# EAGLE board WirelessTransceiverUSB_Rev- (EAGLE 9.6.2)
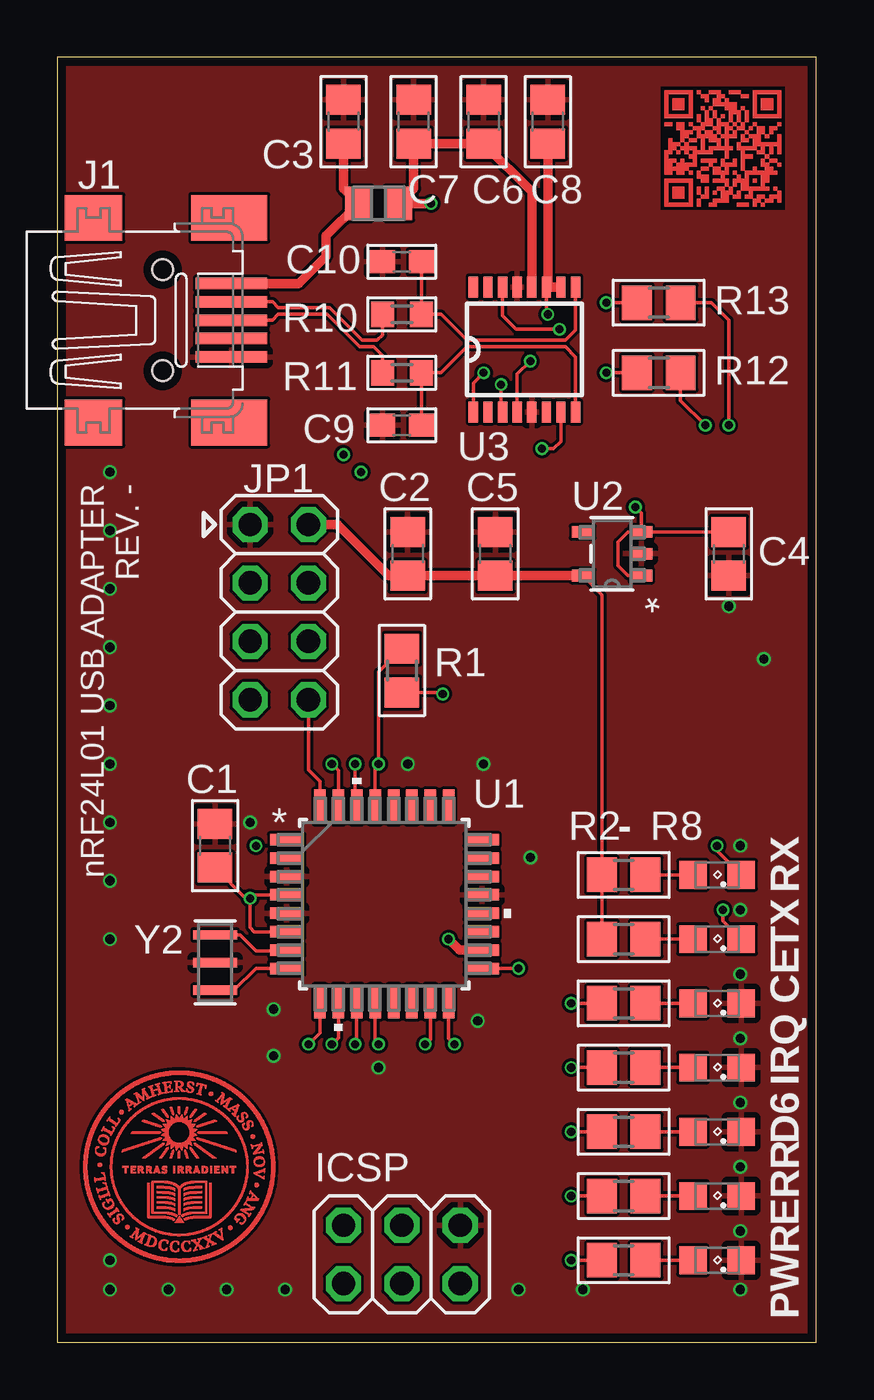
[diagram p0: board, top side]
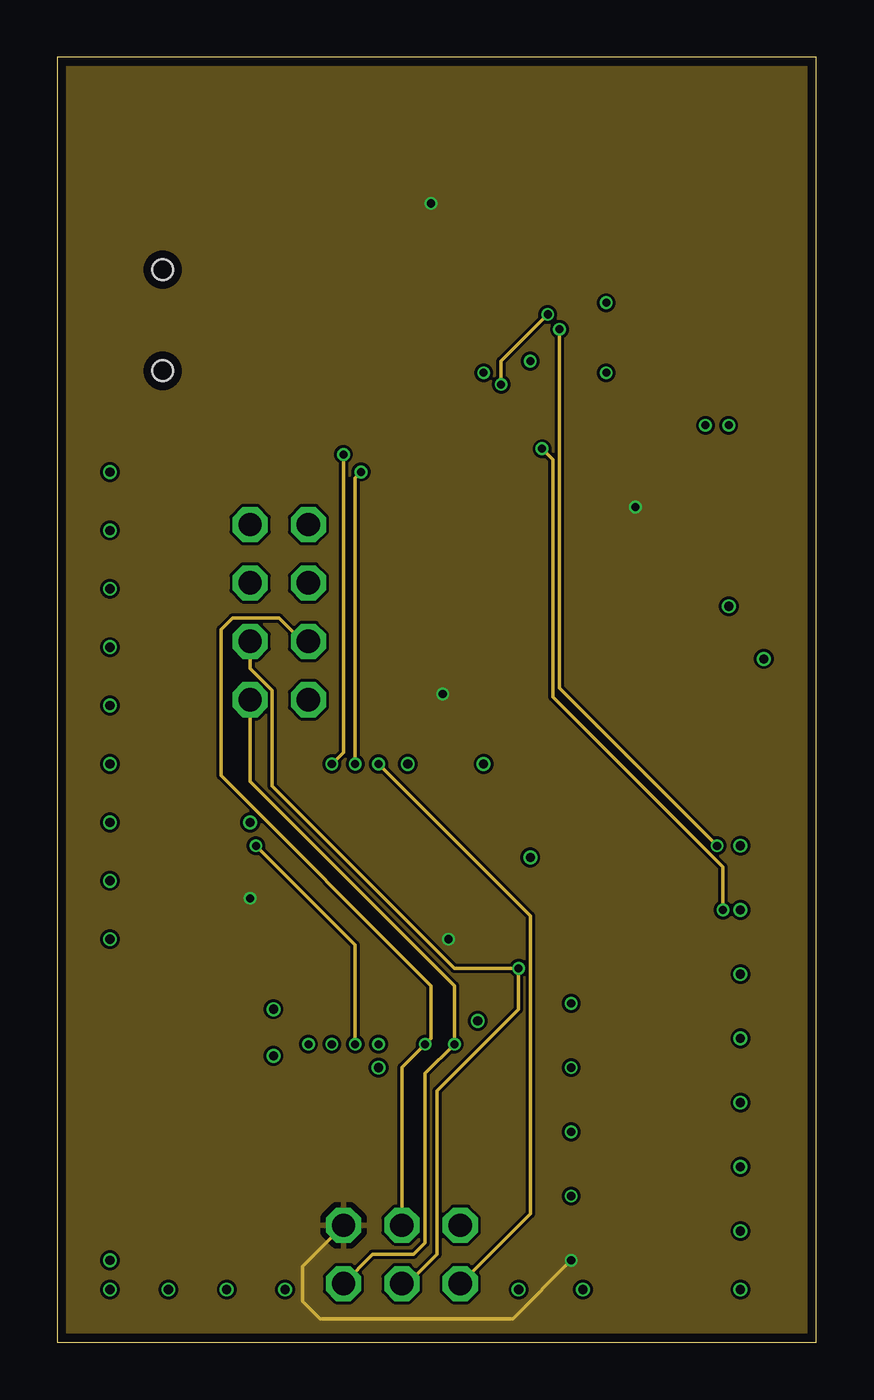
[diagram p1: board, inner layer Route2]
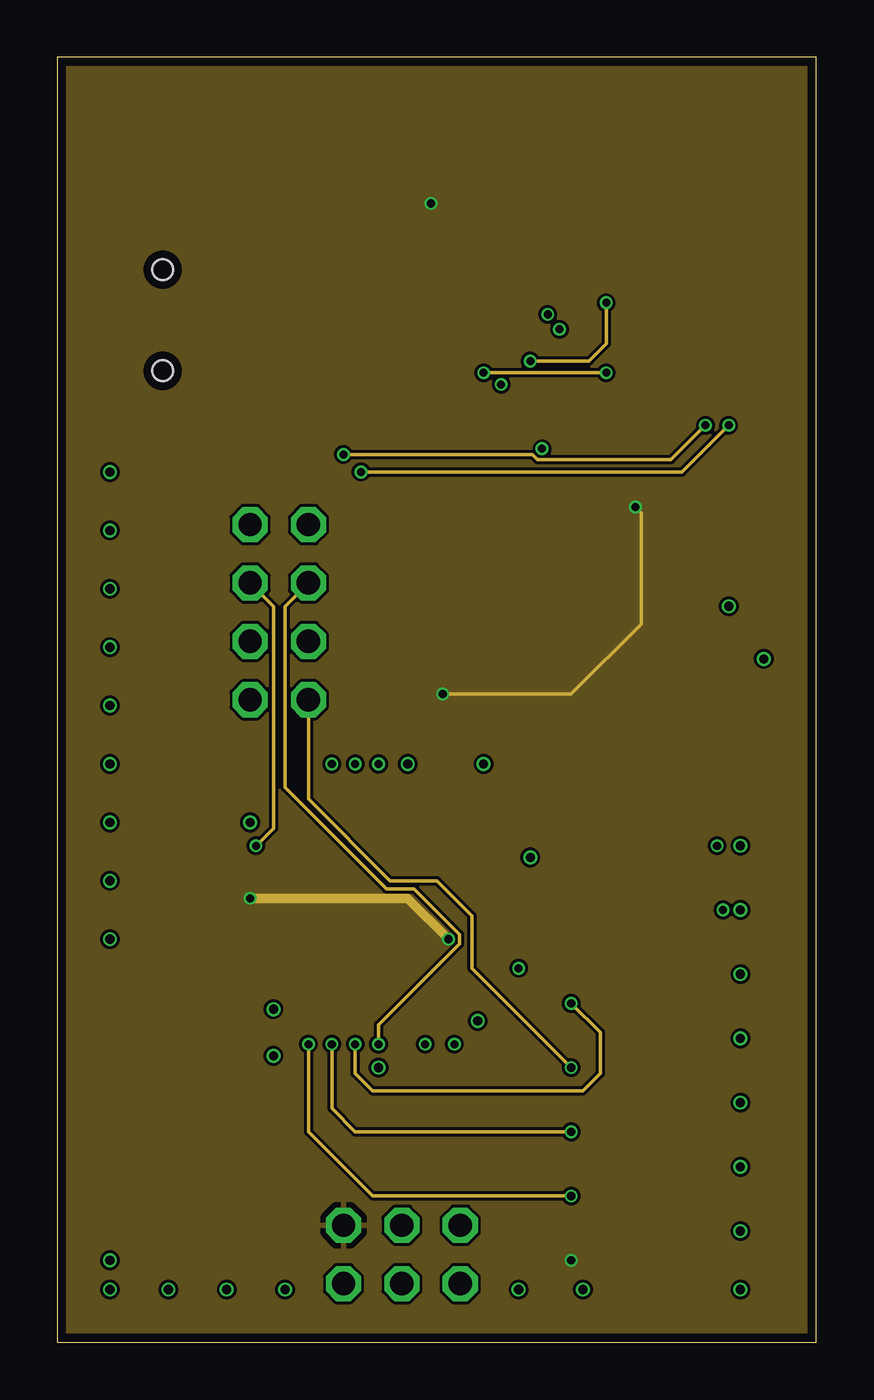
[diagram p2: board, inner layer Route15]
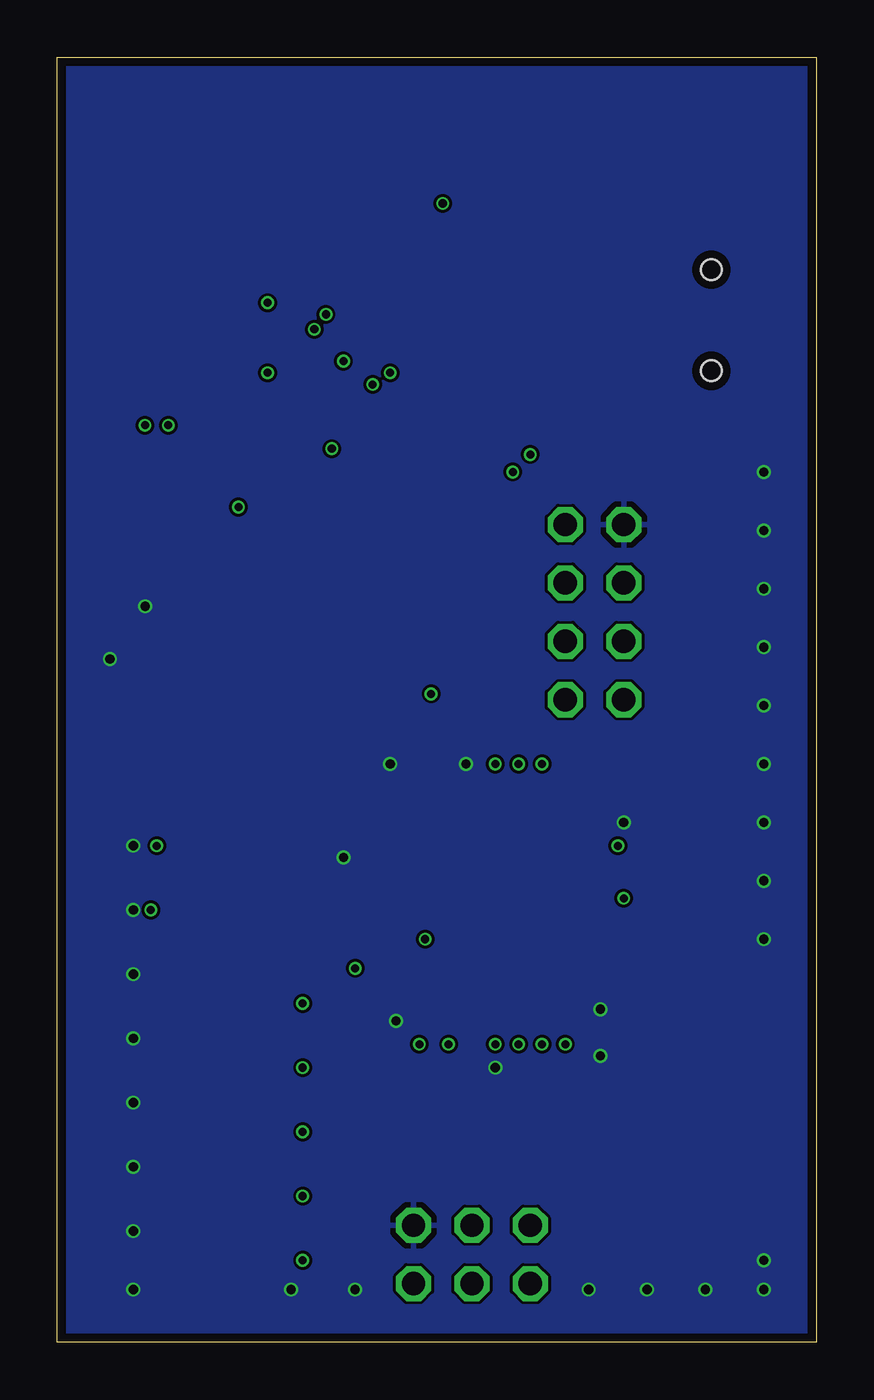
[diagram p3: board, bottom side, seen from below]

Size 33.02 x 55.88 mm. Coordinates in mm from the lower left corner, seen from the top.
Outline: 0,0 33.02,0 33.02,55.88 0,55.88 0,0
Copper layers (1*2*15*16): Top 0.035559375mm / dielectric 0.17018125mm / Route2 0.01778125mm / dielectric 47mil / Route15 0.01778125mm / dielectric 0.17018125mm / Bottom 0.035559375mm
Design rules "oshpark-4layer": minimum track width 5mil, minimum drill 10mil, track to track 5mil, track to pad 5mil, pad to pad 5mil, via to via 5mil, smd to smd 5mil, copper to edge 15mil, drill to drill 6mil, minimum pad ring 4mil, minimum via ring 4mil, stop-mask expansion 1.5mil, vias tented up to drill 0mil, thermal gap 10mil
Net classes: 1 diff: width 0.152 mm
tRestrict: area 4,6.3 to 6.6,8.9; area 26.3,49.3 to 31.7,54.6

## Footprints (pad centres in the part's own frame; a part is rotated, then mirrored left to right if it is on the bottom)
C0805 = smd 1.3 x 1.5: 1 -0.95,0; 2 0.95,0
C0603 = smd 1.1 x 1: 1 -0.85,0; 2 0.85,0
SML0805 = smd 1.2 x 1.2: A 1.05,0; C -1.05,0
2X03 = drill 1.016 octagon: 1 -2.54,-1.27; 2 -2.54,1.27; 3 0,-1.27; 4 0,1.27; 5 2.54,-1.27; 6 2.54,1.27
32005-201 = smd 3.1 x 0.5: 1 3,1.6; 2 3,0.8; 3 3,0; 4 3,-0.8; 5 3,-1.6 | smd 2.5 x 2: M1 -3,-4.45; M2 -3,4.45 | smd 3.3 x 2: M3 2.9,4.45; M4 2.9,-4.45 | hole 0.9: 0,2.2; 0,-2.2
2X04 = drill 1.016 octagon: 1 -3.81,-1.27; 2 -3.81,1.27; 3 -1.27,-1.27; 4 -1.27,1.27; 5 1.27,-1.27; 6 1.27,1.27; 7 3.81,-1.27; 8 3.81,1.27
IND_25_0805_FRT = smd 1.168 x 1.448: 1 -0.876,0; 2 0.876,0
R0805 = smd 1.3 x 1.5: 1 -0.95,0; 2 0.95,0
R0603 = smd 1 x 1.1: 1 -0.85,0; 2 0.85,0
32A_MCH = smd 1.461 x 0.501: 1 -4.25,2.8; 2 -4.25,2; 3 -4.25,1.2; 4 -4.25,0.4; 5 -4.25,-0.4; 6 -4.25,-1.2; 7 -4.25,-2; 8 -4.25,-2.8; 17 4.25,-2.8; 18 4.25,-2; 19 4.25,-1.2; 20 4.25,-0.4; 21 4.25,0.4; 22 4.25,1.2; 23 4.25,2; 24 4.25,2.8 | smd 0.501 x 1.461: 9 -2.8,-4.25; 10 -2,-4.25; 11 -1.2,-4.25; 12 -0.4,-4.25; 13 0.4,-4.25; 14 1.2,-4.25; 15 2,-4.25; 16 2.8,-4.25; 25 2.8,4.25; 26 2,4.25; 27 1.2,4.25; 28 0.4,4.25; 29 -0.4,4.25; 30 -1.2,4.25; 31 -2,4.25; 32 -2.8,4.25
UJ_5_ADI = smd 0.953 x 0.508: 1 -1.276,0.95; 2 -1.276,0; 3 -1.276,-0.95; 4 1.276,-0.95; 5 1.276,0.95
SSOP16 = smd 0.914 x 0.406: 1 -2.718,2.223; 2 -2.718,1.587; 3 -2.718,0.953; 4 -2.718,0.318; 5 -2.718,-0.318; 6 -2.718,-0.953; 7 -2.718,-1.587; 8 -2.718,-2.223; 9 2.718,-2.223; 10 2.718,-1.587; 11 2.718,-0.953; 12 2.718,-0.318; 13 2.718,0.318; 14 2.718,0.953; 15 2.718,1.587; 16 2.718,2.223
CSTNE16M0V530000R0_MUR = smd 0.406 x 1.905: 1 -1.2,0; 2 0,0; 3 1.2,0

## Placement (x,y rotation side)
C1  1u  [C0805]  6.86,21.59 90 top
C2  1u  [C0805]  15.24,34.29 90 top
C3  10n  [C0805]  12.45,53.09 90 top
C4  1u  [C0805]  29.21,34.29 270 top
C5  1u  [C0805]  19.05,34.29 90 top
C6  100n  [C0805]  18.54,53.09 90 top
C7  4.7u  [C0805]  15.49,53.09 90 top
C8  100n  [C0805]  21.34,53.09 90 top
C9  47p  [C0603]  14.99,39.88 180 top
C10  47p  [C0603]  14.99,46.99 180 top
CE  [SML0805]  28.7,14.73 180 top
ICSP  [2X03]  14.99,3.81 0 top
IRQ  [SML0805]  28.7,11.94 180 top
J1  MINI-USB-32005-201  [32005-201]  4.57,44.45 0 top
JP1  [2X04]  9.65,31.75 90 top
L1  2508056017Y2  [IND_25_0805_FRT]  13.97,49.53 0 top
PD5  [SML0805]  28.7,6.35 180 top
PD6  [SML0805]  28.7,9.14 180 top
PWR  [SML0805]  28.7,3.56 180 top
R1  4.7k  [R0805]  14.99,29.21 90 top
R2  4.7k  [R0805]  24.64,20.32 0 top
R3  4.7k  [R0805]  24.64,17.53 0 top
R4  4.7k  [R0805]  24.64,14.73 0 top
R5  4.7k  [R0805]  24.64,11.94 0 top
R6  4.7k  [R0805]  24.64,9.14 0 top
R7  4.7k  [R0805]  24.64,6.35 0 top
R8  4.7k  [R0805]  24.64,3.56 0 top
R10  27  [R0603]  14.99,44.7 180 top
R11  27  [R0603]  14.99,42.16 0 top
R12  1k  [R0805]  26.16,42.16 180 top
R13  1k  [R0805]  26.16,45.21 180 top
RX  [SML0805]  28.7,20.32 180 top
TX  [SML0805]  28.7,17.53 180 top
U1  ATMEGA328PB-AU  [32A_MCH]  14.22,19.05 0 top
U2  ADP121-AUJZ33R7  [UJ_5_ADI]  24.13,34.29 180 top
U3  FT230XS  [SSOP16]  20.32,43.18 90 top
Y2  CSTNE16M0V530000R0  [CSTNE16M0V530000R0_MUR]  6.86,16.51 90 top

## Library data of the parts
C1-C10 R1-R8 R10-R13 = rcl
CE IRQ PD5 PD6 PWR RX TX = led
ICSP JP1 = pinhead
J1 = con-cypressindustries; OC_FARNELL: unknown; OC_NEWARK: unknown
L1 = rcl; COPYRIGHT: Copyright (C) 2023 Ultra Librarian. All rights reserved.; MANUFACTURER_PART_NUMBER: 2508056017Y2; MFR_NAME: Fair-Rite
U1 = microchip; COPYRIGHT: Copyright (C) 2023 Ultra Librarian. All rights reserved.; MANUFACTURER_PART_NUMBER: ATMEGA328PB-AU; MFR_NAME: Microchip
U2 = linear; COPYRIGHT: Copyright (C) 2023 Ultra Librarian. All rights reserved.; MANUFACTURER_PART_NUMBER: ADP121-AUJZ33R7; MFR_NAME: Analog Devices Inc
U3 = ftdichip
Y2 = murata; COPYRIGHT: Copyright (C) 2023 Ultra Librarian. All rights reserved.; MANUFACTURER_PART_NUMBER: CSTNE16M0V530000R0; MFR_NAME: Murata

## Nets
3V3: C2.1 C5.1 JP1.7 R2.1 R3.1 U2.5
5V0: C1.1 C4.1 C6.1 C7.1 ICSP.2 L1.2 R1.1 R8.1 U1.4 U1.6 U1.18 U2.1 U2.3 U3.12
CE: JP1.6 R4.1 U1.11
CSN: JP1.5 U1.12
D_N [diff]: J1.2 R10.2
D_P [diff]: J1.3 R11.1
GND: C1.2 C2.2 C3.2 C4.2 C5.2 C6.2 C7.2 C8.2 C9.2 C10.2 CE.C ICSP.6 IRQ.C J1.5 JP1.8 PD5.C PD6.C PWR.C U1.3 U1.5 U1.21 U2.2 U3.5 U3.13 Y2.2
ID: J1.4
IRQ: JP1.1 R5.1 U1.32
MISO: ICSP.1 JP1.2 U1.16
MOSI: ICSP.4 JP1.3 U1.15
N$1: R2.2 RX.A
N$2: U1.7 Y2.3
N$3: U1.8 Y2.1
N$4: R3.2 TX.A
N$5: CE.A R4.2
N$6: IRQ.A R5.2
N$7: PD5.A R7.2
N$8: PD6.A R6.2
N$9: PWR.A R8.2
N$11: C8.1 U3.3 U3.10 U3.11
N$13: TX.C U3.7
N$14: RX.C U3.14
N$15: R12.2 U3.1
N$16: R13.2 U3.4
PD5: R7.1 U1.9
PD6: R6.1 U1.10
RESET: ICSP.5 R1.2 U1.29
RX: R12.1 U1.31
SCK: ICSP.3 JP1.4 U1.17
TX: R13.1 U1.30
USBD_N [diff]: C10.1 R10.1 U3.9
USBD_P [diff]: C9.1 R11.2 U3.8
VBUS: C3.1 J1.1 L1.1

## Tracks (layer width: path | path; a pad name or v marks a point on that pad's centre or on a via)
3V3
  Top 0.152: R3.1 R2.1 23.69,32.51 U2.5
  Top 0.406: U2.5 C5.1 C2.1 14.41,33.34 12.19,35.56 JP1.7
5V0  (via drill 0.35)
  Top 0.152: R8.1 v22.35,3.56 | U2.3 C4.1 | U2.3 25.41,36.06 v25.15,36.32 | U2.1 24.83,33.34 24.38,33.78 24.38,34.8 24.83,35.24 U2.3 | U1.4 8.53,19.45 v8.38,19.3 | U1.6 8.57,17.85 8.38,18.03 v8.38,19.3 | C1.1 8.19,19.3 v8.38,19.3 | R1.1 16.7,28.26 v16.76,28.19
  Top 0.406: U1.18 17.49,17.05 v17.02,17.53 | U3.12 20.64,50.04 C6.1 C7.1 15.49,50.18 L1.2 v16.26,49.53
  Route2 0.152: v22.35,3.56 19.81,1.02 11.43,1.02 10.67,1.78 10.67,3.3 ICSP.2
  Route15 0.152: v16.76,28.19 22.35,28.19 25.4,31.24 25.4,36.07 v25.15,36.32
  Route15 0.406: v17.02,17.53 15.24,19.3 v8.38,19.3
  pour Route2: 0,0 33.02,0 33.02,55.88 0,55.88
  pour Route15: 0,0 33.02,0 33.02,55.88 0,55.88
CE  (via drill 0.35)
  Top 0.152: U1.11 13.02,13.02 v12.95,12.95 | R4.1 v22.35,14.73
  Route2 0.152: v8.64,21.59 12.95,17.27 v12.95,12.95
  Route15 0.152: v22.35,14.73 23.62,13.46 23.62,11.68 22.86,10.92 13.72,10.92 12.95,11.68 v12.95,12.95 | JP1.6 9.4,32 9.4,22.35 v8.64,21.59
CSN  (via drill 0.35)
  Top 0.152: U1.12 13.82,13.1 v13.97,12.95
  Route15 0.152: JP1.5 9.91,32 9.91,24.13 14.33,19.71 15.51,19.71 17.5,17.72 17.5,17.33 13.97,13.8 v13.97,12.95
D_N
  Top 0.152: R10.2 14.14,43.8 13.91,43.57 13.26,43.57 11.85,44.99 9.61,44.99 9.35,45.25 J1.2
D_P
  Top 0.152: R11.1 14.14,42.91 13.76,43.29 13.15,43.29 11.73,44.71 9.61,44.71 9.35,44.45 J1.3
GND  (via drill 0.4)
  other vias: 15.24,25.15 18.54,25.15 20.57,21.08 18.29,13.97 13.97,11.94 9.4,12.45 9.4,14.48 30.73,29.72 29.21,32 29.72,21.59 29.72,18.8 29.72,16 29.72,13.21 29.72,10.41 29.72,7.62 29.72,4.83 29.72,2.29 8.38,22.61 2.29,17.53 2.29,20.07 2.29,22.61 2.29,25.15 2.29,27.69 2.29,30.23 2.29,32.77 2.29,35.31 2.29,37.85 2.29,3.56 2.29,2.29 4.83,2.29 7.37,2.29 9.91,2.29 20.07,2.29 22.86,2.29
  pour Bottom: 0,55.88 33.02,55.88 33.02,0 0,0
  pour Top: 33.02,55.88 0,55.88 0,0 33.02,0
IRQ  (via drill 0.35)
  Top 0.152: U1.32 11.42,24.39 10.92,24.89 JP1.1 | R5.1 v22.35,11.94
  Route15 0.152: v22.35,11.94 18.03,16.26 18.03,18.54 16.51,20.07 14.48,20.07 10.92,23.62 JP1.1
MISO  (via drill 0.35)
  Top 0.152: U1.16 17.02,13.2 v17.27,12.95
  Route2 0.152: ICSP.1 13.72,3.81 15.49,3.81 16,4.32 16,11.68 v17.27,12.95 17.27,15.49 8.38,24.38 JP1.2
MOSI  (via drill 0.35)
  Top 0.152: U1.15 16.22,13.18 v16,12.95
  Route2 0.152: ICSP.4 14.99,11.94 v16,12.95 16.26,13.21 16.26,15.49 7.11,24.64 7.11,30.99 7.62,31.5 9.65,31.5 10.67,30.48 JP1.3
N$1
  Top 0.152: R2.2 RX.A
N$2
  Top 0.152: Y2.3 7.94,17.71 8.64,17.02 9.94,17.02 U1.7
N$3
  Top 0.152: Y2.1 7.69,15.31 8.64,16.26 U1.8
N$4
  Top 0.152: R3.2 TX.A
N$5
  Top 0.152: R4.2 CE.A
N$6
  Top 0.152: R5.2 IRQ.A
N$7
  Top 0.152: R7.2 PD5.A
N$8
  Top 0.152: R6.2 PD6.A
N$9
  Top 0.152: R8.2 PWR.A
N$11  (via drill 0.35)
  Top 0.152: U3.11 21.27,44.77 v21.34,44.7 | v19.3,41.66 19.3,40.53 U3.3
  Top 0.406: U3.10 U3.11 21.34,45.96 C8.1
  Route2 0.152: v21.34,44.7 19.3,42.67 v19.3,41.66
N$13  (via drill 0.35)
  Top 0.152: TX.C 28.96,18.32 v28.96,18.8 | v21.08,38.86 21.59,38.86 21.91,39.18 U3.7
  Route2 0.152: v21.08,38.86 21.57,38.38 21.57,28.05 28.96,20.66 v28.96,18.8
N$14  (via drill 0.35)
  Top 0.152: U3.14 19.37,44.64 19.95,44.05 v21.84,44.05 | v28.7,21.59 28.7,21.37 RX.C
  Route2 0.152: v21.84,44.05 21.84,28.45 v28.7,21.59
N$15  (via drill 0.35)
  Top 0.152: U3.1 18.1,41.72 v18.54,42.16 | v23.88,42.16 R12.2
  Route15 0.152: v18.54,42.16 v23.88,42.16
N$16  (via drill 0.35)
  Top 0.152: U3.4 20,42.1 v20.57,42.67 | v23.88,45.21 R13.2
  Route15 0.152: v20.57,42.67 23.11,42.67 23.88,43.43 v23.88,45.21
PD5  (via drill 0.35)
  Top 0.152: U1.9 11.42,13.46 v10.92,12.95 | R7.1 v22.35,6.35
  Route15 0.152: v22.35,6.35 13.72,6.35 10.92,9.14 v10.92,12.95
PD6  (via drill 0.35)
  Top 0.152: U1.10 12.22,13.24 v11.94,12.95 | R6.1 v22.35,9.14
  Route15 0.152: v22.35,9.14 12.95,9.14 11.94,10.16 v11.94,12.95
RESET  (via drill 0.35)
  Top 0.152: U1.29 13.82,25 v13.97,25.15 13.97,29.14 R1.2
  Route2 0.152: ICSP.5 20.57,5.59 20.57,18.54 v13.97,25.15
RX  (via drill 0.35)
  Top 0.152: U1.31 12.22,24.86 v11.94,25.15 | v28.19,39.88 27.11,40.96 R12.1
  Route2 0.152: v11.94,25.15 12.45,25.65 v12.45,38.61
  Route15 0.152: v12.45,38.61 20.66,38.61 20.88,38.38 26.7,38.38 v28.19,39.88
SCK  (via drill 0.35)
  Top 0.152: U1.17 v20.07,16.26
  Route2 0.152: ICSP.3 15.24,2.54 16.51,3.81 16.51,10.92 20.07,14.48 v20.07,16.26 17.27,16.26 9.35,24.18 9.35,28.34 8.38,29.3 JP1.4
TX  (via drill 0.35)
  Top 0.152: U1.30 12.95,23.37 v12.95,25.15 | v29.21,39.88 29.21,44.45 28.45,45.21 R13.1
  Route2 0.152: v12.95,25.15 12.95,37.59 v13.21,37.85
  Route15 0.152: v13.21,37.85 27.18,37.85 v29.21,39.88
USBD_N
  Top 0.152: U3.9 22.54,44.02 22.1,43.57 17.82,43.57 16.69,44.7 R10.1 C10.1
USBD_P
  Top 0.152: U3.8 22.54,42.85 22.1,43.29 17.82,43.29 16.69,42.16 R11.2 C9.1
VBUS
  Top 0.406: J1.1 10.49,46.05 11.68,47.24 11.68,48.12 L1.1 12.45,50.18 C3.1
(copper drawn outside any net)
  shapes: Top area x8489

## Text on the board
tPlace: nRF24L01 USB ADAPTER / REV. - | - | RX | TX | CE | IRQ | D6 | ERR | PWR